# Altium PCB bldc-robot-main-board-2016.PcbDoc
Units mm, origin at the board's own origin, x right, y up, seen from the top; angles counter-clockwise.
Board outline 35 x 45 mm, 2 copper layers (Top Layer, Bottom Layer), stack 1.571 mm thick; 72 components, 74 nets, 415 pads, 119 vias.
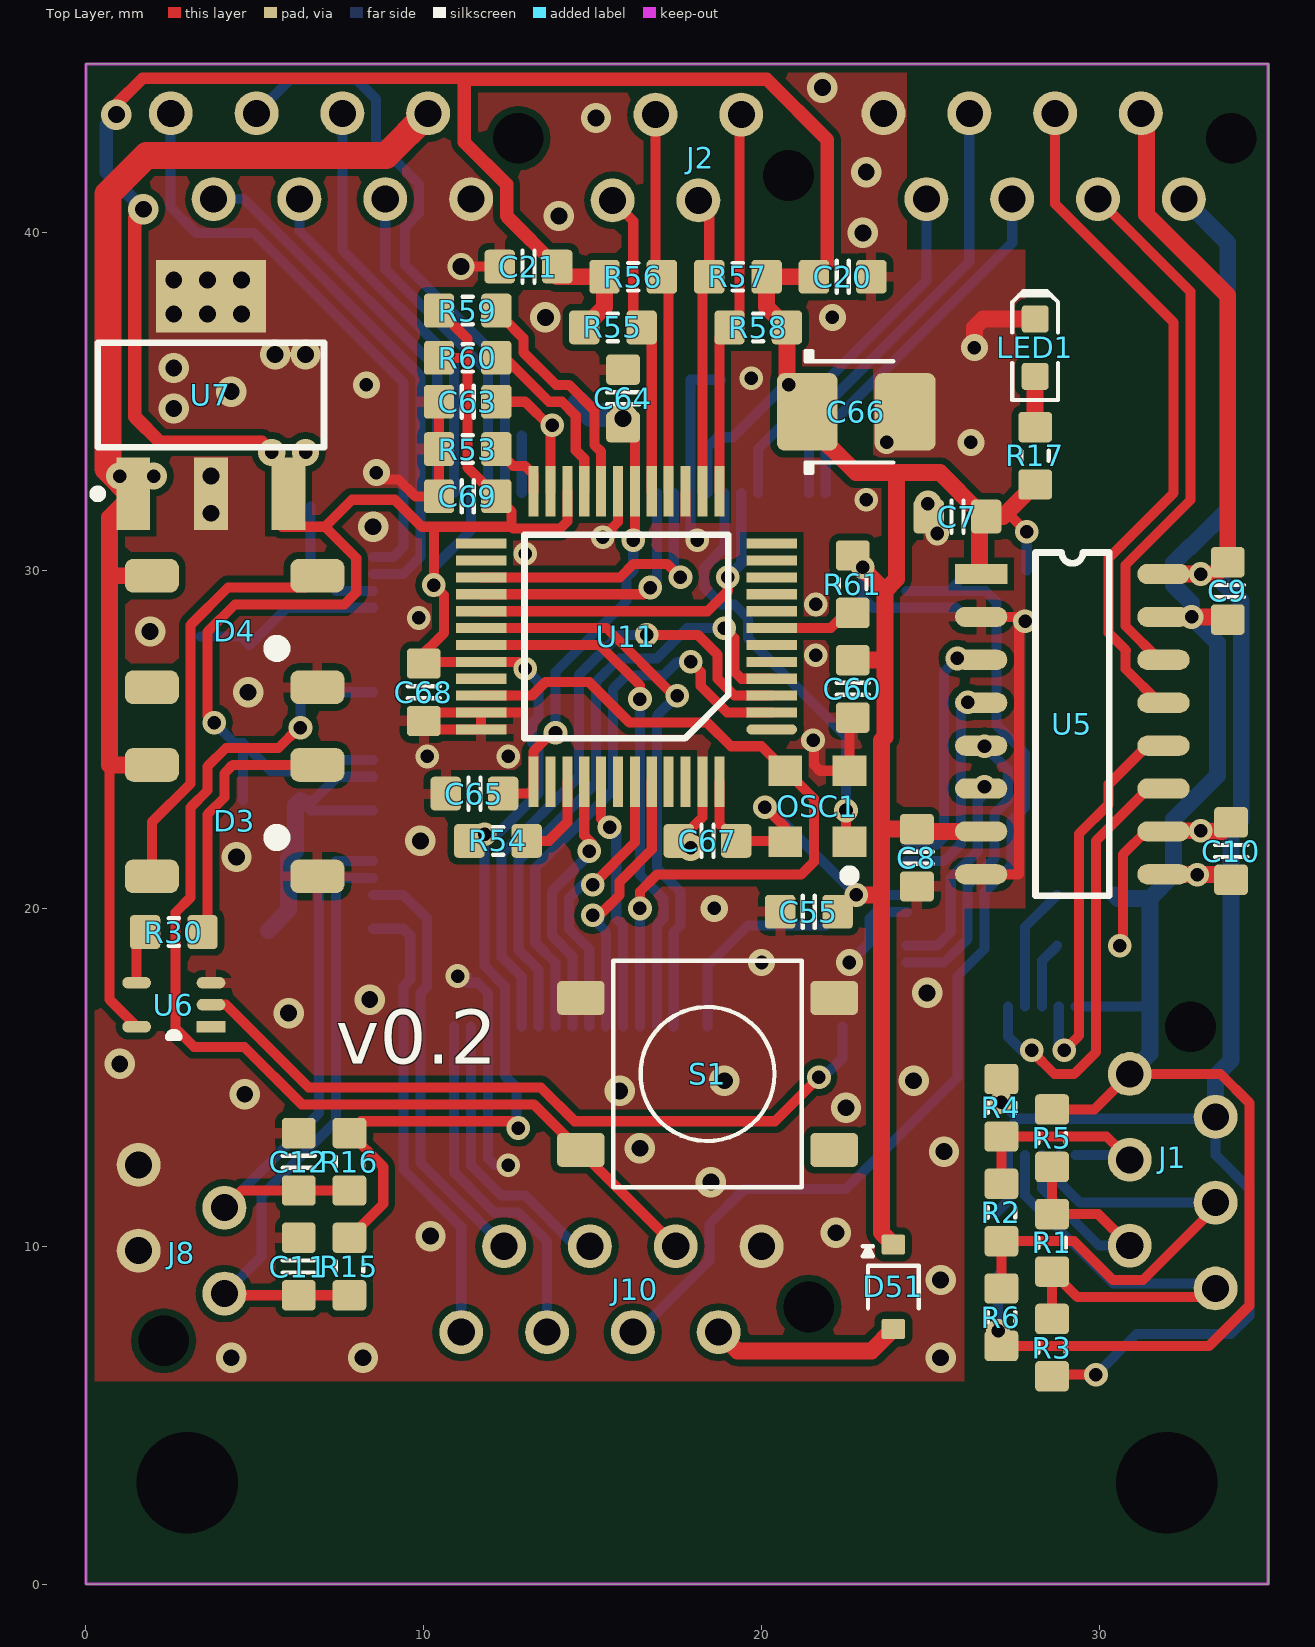
[diagram p0: Top Layer view]
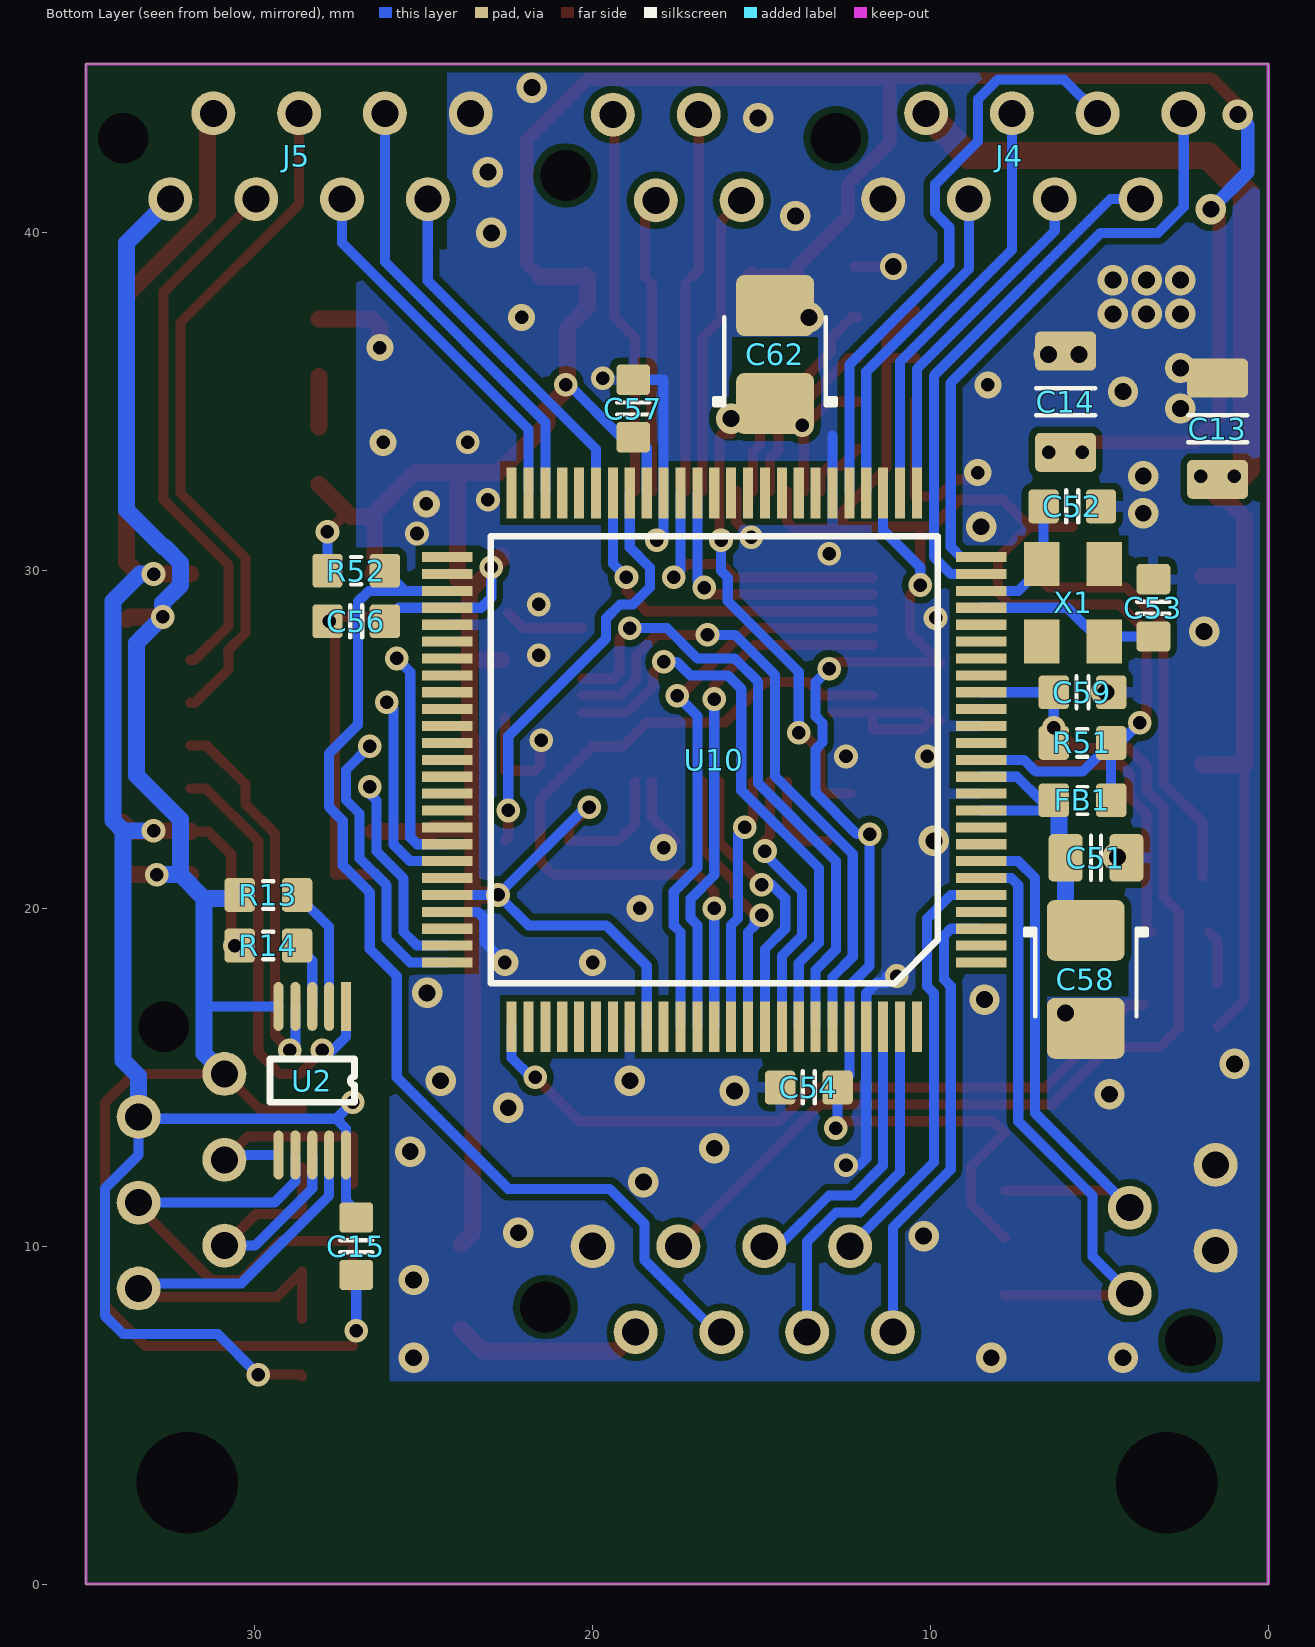
[diagram p1: Bottom Layer view, seen from below]

## Layer stack, top to bottom
Top Solder: solder mask 0.0102, Solder Resist, Dk 3.5
Top Layer: signal copper 0.0356
Dielectric 1: dielectric 1.5, FR-4, Dk 4.8
Bottom Layer: signal copper 0.0356
Bottom Solder: solder mask 0.0102, Solder Resist, Dk 3.5

## Board outline
0,0 35,0 35,45 0,45

## Design rules (kind name [scope] priority, off if disabled: settings)
Clearance [All] p1: gap=0.2
ComponentClearance ComponentClearanceIgnore [InComponent('C101')] p1: gap=0 collisioncheckmode=3 verticalgap=0 showdistances=FALSE
ComponentClearance [All] p2: gap=0.2 collisioncheckmode=3 verticalgap=0.2 showdistances=FALSE
DiffPairsRouting [All] p1: maxlimit=1 minlimit=0.2 mostfreqgap=0.2 toplayer_minwidth=0.2 toplayer_maxwidth=1 toplayer_prefwidth=0.3 bottomlayer_minwidth=0.2 bottomlayer_maxwidth=1 bottomlayer_prefwidth=0.3 maxuncoupledlength=12.7
HoleSize [All] p1: absolutevalues=TRUE maxlimit=5 minlimit=0.025 maxpercent=80.000 minpercent=20.000
MinimumSolderMaskSliver [All] p1: minsoldermaskwidth=0.1
PolygonConnect PolygonConnectDirect [IsVia or InComponent('U7') or InNet('PGND')or InNet('PC_PWR') or InNet('Net16V_1') or InNet('Net19V_IN_1') or InComponent('C66') or InComponent('J4') or InComponent('C62') or InComponent('C13') or InComponent('C14') or InComponent('C58') or InComponent('S1') or InComponent('J8') or InComponent('J5') or InComponent('J10')] p1: connectstyle=Direct reliefconductorwidth=0.254 reliefentries=4 polygonreliefangle="90 Angle" airgapwidth=0.254
PolygonConnect [All] p2: connectstyle=Relief reliefconductorwidth=0.3 reliefentries=4 polygonreliefangle="90 Angle" airgapwidth=0.2
RoomDefinition bldc-robot-main-mbed [InComponentClass('bldc-robot-main-mbed')] p1: confinementstyle=ConfineIn formatcopy=TRUE lockcomponents=FALSE outline 0,0 50,0 50,50 0,50
RoomDefinition bldc-robot-main-board-2016 [InComponentClass('bldc-robot-main-board-2016')] p2: confinementstyle=ConfineIn formatcopy=TRUE lockcomponents=FALSE outline 0,0 50,0 50,50 0,50
RoutingVias [All] p1: holewidth=0.4 width=0.7 viastyle="Through Hole" minholewidth=0.3 minwidth=0.6 maxholewidth=1.5 maxwidth=2
SolderMaskExpansion [All] p1: expansion=0.102
Width [All] p1: maxlimit=2 minlimit=0.2 preferedwidth=0.3 minimp=50.000000 maximp=50.000000 favimp=50.000000
26 further rules are at their usual default settings.

## Classes and differential pairs
component class bldc-robot-main-mbed: C20 C21 C51 C52 C53 C54 C55 C56 C57 C58 C59 C60 C62 C63 C64 C65 C66 C67 C68 C69 D51 FB1 J10 OSC1 R51 R52 R53 R54 R55 R56 R57 R58 R59 R60 R61 S1 U10 U11 X1
component class bldc-robot-main-board-2016: C7 C8 C9 C10 C11 C12 C13 C14 C15 D3 D4 J1 J2 J4 J5 J8 LED1 R1 R2 R3 R4 R5 R6 R13 R14 R15 R16 R17 R30 U2 U5 U6 U7
differential pair RD: +RD_P -RD_N
differential pair TD: +TD_P -TD_N

## Components (designator, comment, footprint, x,y, rotation, side; value= is the part's Value field where it differs from the comment)
C7 "100n" CAPC1608X90N 25.8,31.6 r180 top
C8 "100n" CAPC1608X90N 24.6,21.5 r90 top
C9 "100n" CAPC1608X90N 33.8,29.4 r90 top
C10 "100n" CAPC1608X90N 33.9,21.7 r270 top
C11 "100n" CAPC1608X90N 6.3,9.4 r90 top
C12 "100n" CAPC1608X90N 6.3,12.5 r90 top
C13 "10u" CAPC3216X180N 1.5,34.2 r90 bottom
C14 "10u" CAPC3216X180N 6,35 r90 bottom
C15 "100n" CAPC1608X90N 27,10 r270 bottom
C20 "100nF" CAPC1608X90N 22.4,38.7 r180 top
C21 "100nF" CAPC1608X90N 13.1,39 r180 top
C51 "10u" CAPC2012X135N 5.1,21.5 r180 bottom
C52 "8pF" CAPC1608X90N 5.8,31.9 r180 bottom
C53 "8pF" CAPC1608X90N 3.4,28.9 r90 bottom
C54 "100nF" CAPC1608X90N 13.6,14.7 r0 bottom
C55 "100nF" CAPC1608X90N 21.4,19.9 r180 top
C56 "100nF" CAPC1608X90N 27,28.5 r0 bottom
C57 "100nF" CAPC1608X90N 18.8,34.8 r90 bottom
C58 "10uF Ta" CAPMP3528X210N 5.4,17.9 r270 bottom
C59 "100nF" CAPC1608X90N 5.5,26.4 r180 bottom
C60 "100nF" CAPC1608X90N 22.7,26.5 r90 top
C62 "10uF Ta" CAPMP3528X210N 14.6,36.4 r90 bottom
C63 "100nF" CAPC1608X90N 11.3,35 r0 top
C64 "100nF" CAPC1608X90N 15.9,35.1 r270 top
C65 "100nF" CAPC1608X90N 11.5,23.4 r180 top
C66 "10uF Ta" CAPMP3528X210N 22.8,34.7 r0 top
C67 "100nF" CAPC1608X90N 18.4,22 r0 top
C68 "100nF" CAPC1608X90N 10,26.4 r90 top
C69 "100nF" CAPC1608X90N 11.3,32.2 r0 top
D3 "WS2812B" WS2812B 4.4,22.6 r0 top
D4 "WS2812B" WS2812B 4.4,28.2 r0 top
D51 "" SOD323 23.9,8.8 r270 top
FB1 "60 Ohm" INDC1608N 5.5,23.2 r0 bottom
J1 "RS485" MICRO-MATCH-6 30.9,15.1 r90 top
J2 "ETHERNET" MICRO-MATCH-4 19.4,43.5 r0 top
J4 "HEADER-8" MICRO-MATCH-8 11.4,41 r0 bottom
J5 "HEADER-8" MICRO-MATCH-8 32.5,41 r0 bottom
J8 "BTNS" MICRO-MATCH-4 4.1,8.6 r270 top
J10 "ISP" MICRO-MATCH-8 20,10 r0 top
LED1 "Red" LED-0603-RED 28.1,36.6 r90 top
OSC1 "DSC1033" DSC1033-3.2x2.5 22.6,21.975 r90 top
R1 "120R" RESC1608X55N 28.6,10.1 r90 top
R2 "120R" RESC1608X55N 27.1,11 r270 top
R3 "750R" RESC1608X55N 28.6,7 r90 top
R4 "750R" RESC1608X55N 27.1,14.1 r270 top
R5 "750R" RESC1608X55N 28.6,13.2 r90 top
R6 "750R" RESC1608X55N 27.1,7.9 r270 top
R13 "10k" RESC1608X55N 29.6,20.4 r180 bottom
R14 "10k" RESC1608X55N 29.6,18.9 r0 bottom
R15 "10k" RESC1608X55N 7.8,9.4 r90 top
R16 "10k" RESC1608X55N 7.8,12.5 r90 top
R17 "470R" RESC1608X55N 28.1,33.4 r270 top
R30 "470R" RESC1608X55N 2.6,19.3 r180 top
R51 "10k" RESC1608X55N 5.5,24.9 r0 bottom
R52 "10k" RESC1608X55N 27,30 r0 bottom
R53 "4k87" RESC1608X55N 11.3,33.6 r180 top
R54 "2k2" RESC1608X55N 12.2,22 r0 top
R55 "49R9" RESC1608X55N 15.6,37.2 r180 top
R56 "49R9" RESC1608X55N 16.2,38.7 r0 top
R57 "49R9" RESC1608X55N 19.3,38.7 r0 top
R58 "49R9" RESC1608X55N 19.9,37.2 r180 top
R59 "2k2" RESC1608X55N 11.3,37.7 r180 top
R60 "2k2" RESC1608X55N 11.3,36.3 r180 top
R61 "10k" RESC1608X55N 22.7,29.6 r90 top
S1 "TS-1143S-WP" TS-1143S 18.4,15.1 r0 top
U2 "SN65HVD73" SOP10 27.3,17.1 r270 bottom
U5 "SI8641" SOIC16 26.5,29.9 r0 top
U6 "MC74VHC1GT50" SC70-5 3.7,16.5 r180 top
U7 "MCP1825S" SOT230P700X180-4N 3.7,35.2 r90 top
U10 "LPC1768" LQFP100 8.5,18.4 r0 bottom
U11 "DP83848C" PQFP48 20.3,25.3 r180 top
X1 "12MHz" XTAL-3.2x2.5 6.7,30.2 r270 bottom

## Footprints (in the part's own frame and the unit in brackets; to place one, negate y for a bottom-side part, rotate by r counter-clockwise, add the part's x,y. Pads: shape width x height; smd on the part's side, far side on the other; paste and mask are expansions set on the pad)
CAPC1608X90N [mm] "Chip Capacitor, Body 1.6x0.8mm, EIA 0603, IPC Medium Density"
  round 0.254 on Mech15: 0(0,0)
  rrect25% 0.9x1 smd: 1(-0.85,0) 2(0.85,0)
  Top Layer pour cut-out: -0.6,0.5 -0.4,0.7 0.4,0.7 0.6,0.5 0.6,-0.5 0.4,-0.7 -0.4,-0.7 -0.6,-0.5
  silkscreen extent -0.18,-0.48 0.18,0.48, body extent -0.85,-0.45 0.85,0.45, height 0.89
CAPC2012X135N [mm] "Chip Capacitor, Body 2.0x1.2mm, EIA 0805, IPC Medium Density"
  round 0.254 on Mech15: 0(0,0)
  rrect25% 1x1.4 smd: 1(-0.9,0) 2(0.9,0)
  Top Layer pour cut-out: -0.675,0.7 -0.475,0.9 0.475,0.9 0.675,0.7 0.675,-0.7 0.475,-0.9 -0.475,-0.9 -0.675,-0.7
  silkscreen extent -0.15,-0.65 0.15,0.65, body extent -1.1,-0.72 1.1,0.73, height 1.34
CAPC3216X180N [mm] "Chip Capacitor, Body 3.2x1.6mm, 1.8mm H, EIA 1206, IPC Medium Density"
  round 0.508 on Mech15: 0(0,0)
  rrect25% 1.15x1.8 smd: 1(-1.5,0) 2(1.5,0)
  silkscreen extent -0.4,-0.88 0.4,0.88, body extent -1.7,-0.9 1.7,0.9, height 1.8
CAPMP3528X210N [mm] "Molded body capacitor, Body 3.5x2.8mm, 1210, IPC Nominal settings"
  round 0.254 on Mech15: 0(0,0)
  rrect25% 1.8x2.3 smd: 1(-1.45,0) 2(1.45,0)
  Top Layer pour cut-out: -0.508,1.27 0.508,1.27 0.508,-1.27 -0.508,-1.27
  silkscreen extent -1.5,-1.8 1.1,1.8, body extent -1.75,-1.4 1.75,1.4, height 2.1
DSC1033-3.2x2.5 [mm]
  rect 0.9x1 smd: 1(0,0) 2(2.1,0) 3(2.1,1.9) 4(0,1.9)
  silkscreen extent -1.1,-0.1 -0.9,0.1, body extent -0.55,-0.3 2.65,2.2, height 0.8
INDC1608N [mm] "Chip bead, Body 1.6x0.8mm, 0603, IPC Medium Density"
  round 0.254 on Mech15: 0(0,0)
  rrect25% 0.9x1 smd: 1(-0.85,0) 2(0.85,0)
  Top Layer pour cut-out: -0.4,0.6 0.4,0.6 0.4,-0.6 -0.4,-0.6
  silkscreen extent -0.15,-0.41 0.15,0.41, body extent -0.8,-0.4 0.8,0.4, height 0.79
LED-0603-RED [mm]
  round 0.254 on Mech15: 0(0,0)
  rrect25% 0.8x0.8 smd: A(-0.85,0) K(0.85,0)
  Top Layer pour cut-out: -0.5,0.5 0.5,0.5 0.5,-0.5 -0.5,-0.5
  silkscreen extent -1.55,-0.67 1.68,0.67, body extent -0.8,-0.4 0.8,0.4, height 0.75
LQFP100 [mm]
  rect 1.5x0.3 smd: 1(0,0) 2(0,-0.5) 3(0,-1) 4(0,-1.5) 5(0,-2) 6(0,-2.5) 7(0,-3) 8(0,-3.5) 9(0,-4) 10(0,-4.5) 11(0,-5) 12(0,-5.5) 13(0,-6) 14(0,-6.5) 15(0,-7) 16(0,-7.5) 17(0,-8) 18(0,-8.5) 19(0,-9) 20(0,-9.5) 21(0,-10) 22(0,-10.5) 23(0,-11) 24(0,-11.5) 25(0,-12) 51(15.8,-12) 52(15.8,-11.5) 53(15.8,-11) 54(15.8,-10.5) 55(15.8,-10) 56(15.8,-9.5) 57(15.8,-9) 58(15.8,-8.5) 59(15.8,-8) 60(15.8,-7.5) 61(15.8,-7) 62(15.8,-6.5) 63(15.8,-6) 64(15.8,-5.5) 65(15.8,-5) 66(15.8,-4.5) 67(15.8,-4) 68(15.8,-3.5) 69(15.8,-3) 70(15.8,-2.5) 71(15.8,-2) 72(15.8,-1.5) 73(15.8,-1) 74(15.8,-0.5) 75(15.8,0)
  rect 0.3x1.5 smd: 26(1.9,-13.9) 27(2.4,-13.9) 28(2.9,-13.9) 29(3.4,-13.9) 30(3.9,-13.9) 31(4.4,-13.9) 32(4.9,-13.9) 33(5.4,-13.9) 34(5.9,-13.9) 35(6.4,-13.9) 36(6.9,-13.9) 37(7.4,-13.9) 38(7.9,-13.9) 39(8.4,-13.9) 40(8.9,-13.9) 41(9.4,-13.9) 42(9.9,-13.9) 43(10.4,-13.9) 44(10.9,-13.9) 45(11.4,-13.9) 46(11.9,-13.9) 47(12.4,-13.9) 48(12.9,-13.9) 49(13.4,-13.9) 50(13.9,-13.9) 76(13.9,1.9) 77(13.4,1.9) 78(12.9,1.9) 79(12.4,1.9) 80(11.9,1.9) 81(11.4,1.9) 82(10.9,1.9) 83(10.4,1.9) 84(9.9,1.9) 85(9.4,1.9) 86(8.9,1.9) 87(8.4,1.9) 88(7.9,1.9) 89(7.4,1.9) 90(6.9,1.9) 91(6.4,1.9) 92(5.9,1.9) 93(5.4,1.9) 94(4.9,1.9) 95(4.4,1.9) 96(3.9,1.9) 97(3.4,1.9) 98(2.9,1.9) 99(2.4,1.9) 100(1.9,1.9)
  silkscreen extent 1.28,-12.61 14.51,0.62, body extent -0.1,-14 15.9,2, height 1.6
MICRO-MATCH-4 [mm]
  round 1.3 hole 0.8: 1(0,0) 2(-1.27,-2.54) 3(-2.54,0) 4(-3.81,-2.54)
  round 0 hole 1.5 unplated: drill(1.4,-1.8)
  body extent -5.41,-3.77 1.6,1.23, height 4
MICRO-MATCH-6 [mm]
  round 1.3 hole 0.8: 1(0,0) 2(-1.27,-2.54) 3(-2.54,0) 4(-3.81,-2.54) 5(-5.08,0) 6(-6.35,-2.54)
  round 0 hole 1.5 unplated: drill(1.4,-1.8)
  body extent -7.95,-3.77 1.6,1.23, height 4
MICRO-MATCH-8 [mm]
  round 1.3 hole 0.8: 1(0,0) 2(-1.27,-2.54) 3(-2.54,0) 4(-3.81,-2.54) 5(-5.08,0) 6(-6.35,-2.54) 7(-7.62,0) 8(-8.89,-2.54)
  round 0 hole 1.5 unplated: drill(1.4,-1.8)
  body extent -10.49,-3.77 1.6,1.23, height 4
PQFP48 [mm]
  oval 1.5x0.3 smd: 1(0,0)
  rect 1.5x0.3 smd: 2(0,-0.5) 3(0,-1) 4(0,-1.5) 5(0,-2) 6(0,-2.5) 7(0,-3) 8(0,-3.5) 9(0,-4) 10(0,-4.5) 11(0,-5) 12(0,-5.5) 25(8.6,-5.5) 26(8.6,-5) 27(8.6,-4.5) 28(8.6,-4) 29(8.6,-3.5) 30(8.6,-3) 31(8.6,-2.5) 32(8.6,-2) 33(8.6,-1.5) 34(8.6,-1) 35(8.6,-0.5) 36(8.6,0)
  rect 0.3x1.5 smd: 13(1.55,-7.05) 14(2.05,-7.05) 15(2.55,-7.05) 16(3.05,-7.05) 17(3.55,-7.05) 18(4.05,-7.05) 19(4.55,-7.05) 20(5.05,-7.05) 21(5.55,-7.05) 22(6.05,-7.05) 23(6.55,-7.05) 24(7.05,-7.05) 37(7.05,1.55) 38(6.55,1.55) 39(6.05,1.55) 40(5.55,1.55) 41(5.05,1.55) 42(4.55,1.55) 43(4.05,1.55) 44(3.55,1.55) 45(3.05,1.55) 46(2.55,1.55) 47(2.05,1.55) 48(1.55,1.55)
  silkscreen extent 1.28,-5.76 7.31,0.27, body extent -0.27,-7.33 8.87,1.82, height 1.62
RESC1608X55N [mm] "Chip Resistor, Body 1.6x0.8mm, EIA 0603, IPC Medium Density"
  round 0.254 on Mech15: 0(0,0)
  rrect25% 0.9x1 smd: 1(-0.85,0) 2(0.85,0)
  Top Layer pour cut-out: -0.6,0.5 -0.4,0.7 0.4,0.7 0.6,0.5 0.6,-0.5 0.4,-0.7 -0.4,-0.7 -0.6,-0.5
  silkscreen extent -0.15,-0.41 0.15,0.41, body extent -0.87,-0.47 0.88,0.48, height 0.54
SC70-5 [mm]
  rect 0.85x0.35 smd: 1(0,0)
  oval 0.85x0.35 smd: 2(0,-0.65) 3(0,-1.3) 4(2.2,-1.3) 5(2.2,0)
  silkscreen extent 0.94,0.16 1.26,0.33, body extent -0.08,-1.7 2.23,0.4, height 1
SOD323 [mm] "SOD-323; 2 Leads; Body 1.8 x 1.35 mm, (LxW)"
  round 0.508 on Mech15: 0(0,0)
  rrect25% 0.6x0.7 smd: A(1.25,0) K(-1.25,0)
  silkscreen extent -1.2,-0.9 0.64,0.75, body extent -1.3,-0.68 1.3,0.68, height 1.1
SOIC16 [mm]
  rect 1.55x0.6 smd: 1(0,0)
  oval 1.55x0.6 smd: 2(0,-1.27) 3(0,-2.54) 4(0,-3.81) 5(0,-5.08) 6(0,-6.35) 7(0,-7.62) 8(0,-8.89) 9(5.4,-8.89) 10(5.4,-7.62) 11(5.4,-6.35) 12(5.4,-5.08) 13(5.4,-3.81) 14(5.4,-2.54) 15(5.4,-1.27) 16(5.4,0)
  silkscreen extent 1.61,-9.53 3.79,0.64, body extent -0.25,-9.42 5.66,0.57, height 1.46
SOP10 [mm]
  rect 1.45x0.3 smd: 1(0,0)
  oval 1.45x0.3 smd: 2(0,-0.5) 3(0,-1) 4(0,-1.5) 5(0,-2) 6(4.4,-2) 7(4.4,-1.5) 8(4.4,-1) 9(4.4,-0.5) 10(4.4,0)
  silkscreen extent 1.56,-2.25 2.84,0.25, body extent -0.27,-2.5 4.63,0.5, height 1.15
SOT230P700X180-4N [mm] "SOT223, 4-Leads, Body 6,50x7,00mm (avg), Pitch 2,30mm, IPC Medium Density"
  rect 2.15x1 smd: 1(-2.925,2.3) 2(-2.925,0) 3(-2.925,-2.3)
  rect 2.15x3.25 smd: 4(2.925,0)
  silkscreen extent -3.05,-3.35 1.55,3.47, body extent -1.85,-3.35 1.85,3.35, height 1.8
TS-1143S [mm] "6.5x6.5mm SMD tact switch 4.3mm stem"
  round 0.508 on Mech15: 0(0,0)
  rrect25% 1.4x1 smd: 1(-3.75,2.25) 1(3.75,2.25) 2(-3.75,-2.25) 2(3.75,-2.25)
  silkscreen extent -2.79,-3.35 2.79,3.35, body extent -4,-3.25 4,3.25, height 4.3
WS2812B [mm]
  rrect50% 1.6x1 smd: 1(-2.45,1.65) 2(-2.45,-1.65) 3(2.45,-1.65) 4(2.45,1.65)
  silkscreen extent 1.05,-0.7 1.45,-0.3, body extent -2.7,-2.5 2.7,2.5, height 1.71
XTAL-3.2x2.5 [mm]
  rect 1.3x1.05 smd: 1(0,0) 2(2.3,0) 3(2.3,1.85) 4(0,1.85)
  body extent -0.45,-0.32 2.75,2.18, height 0.8

## Part data
C7 C8 C9 C10 C11 C12 C15: library part CAPC_100n_0603_X7R_50V_10%, "Capacitor SMD Cer 100nF 10% 50V X7R 0603"
C13 C14: library part CAPC_10u_1206_10V, "Capacitor SMD Cer 10uF 10% 10V X5R 1206"
C20 C21 C52 C53 C54 C55 C56 C57 C59 C60 C63 C64 C65 C67 C68 C69: library part CAPC_18p_0603_100V, "Capacitor SMD Cer 18pF 2% 100V NP0 0603"
C51: library part CAPC_10u_0805_10V, "Capacitor SMD Cer 10uF 10% 10V X5R 0805"
C58 C62 C66: library part CAPT_47u_1210_6V3, "Capacitor SMD Tantalum 47uF 20% 6.3V 1210"
D51: library part DIODE_SCHOTTKY_SS0520, "Diode Schottky SMD 20V 0.5A SOD123"
FB1: library part FERRITE_120R-100MHz_0603, "Ferrite bead 120 Ohm at 100 MHz 2A 0603 SMD"
J1: library part HEADER-6
J2 J8: library part HEADER-4
J10: library part HEADER-8
LED1: library part LED_SMD_Red_0603_220mcd, "LED 0603 SMD Hyper Red 630nm 220mcd 20mA"
R1 R2 R3 R4 R5 R6 R13 R14 R15 R16 R17 R30: library part RES_120R_0603_5%, "Resistor SMD chip 120 Ohm 0.1W 5% 0603"
R51 R52 R53 R54 R55 R56 R57 R58 R59 R60 R61: library part RES_10K_0603_5%, "Resistor SMD chip 10k Ohm 0.1W 5% 0603"
S1: library part SW_SMD_PB_4.3mm, "Switch SMD Tact 4.3mm Stem"
U2: library part SN65HVD3086E
U7: library part MIC5239
X1: library part XTAL-3.2X2.5

## Free pads (board coordinates)
  round 0 hole 3 unplated: 0(3,3) 1(32,3)

## Via types
v1: diameter 0.7, hole 0.4, Top Layer to Bottom Layer, 59 vias
v2: diameter 0.9, hole 0.5, Top Layer to Bottom Layer, 45 vias
v3: diameter 0.8, hole 0.4, Top Layer to Bottom Layer, 14 vias
v4: diameter 0.8, hole 0.5, Top Layer to Bottom Layer, 1 vias

## Nets (pads, with @x,y where several pads share a name; then routed paths per layer and width w, separated by ;. In a path a pad name is that pad's centre, name@x,y a point inside that pad or via, vN(x,y) a via of type N, cw(c..) or ccw(c..) an arc to the next point about the centre after c; other vN are vias at no path point)
3.3V: C7.1 C8.2 C14.1 C20.2 C21.1 C54.1 C55.1 C56.1 C57.1 C60.2 C66.1 C67.2 C68.2 C69.2 D51.K FB1.1 OSC1.4 R15.2 R16.2 R17.2 R51.1 R52.2 R54.1 R55.2 R56.1 R57.2 R58.1 R59.2 R60.2 R61.2 U5.1 U5.7 U7.3 U10.13 U10.28 U10.42 U10.54 U10.71 U10.84 U10.96 U11.22 U11.32 U11.48 | length 195.6
  Top Layer w0.3: v1(3.8,25.5) 3.6,25.7 3.6,28.188 4.412,29 7.649,29 8,29.351 8,30.374 7.074,31.3 ; U7.3@5.8,31.3 7.074,31.3 ; R15.2 8.8,11.25 8.8,12.35 R16.2 8.15,13.7 12.6,13.7 v1(12.8,13.5) ; C68.2@9.7,27.25 C68.2@9.75,27.3 ; R60.2 11.3,36.3 ; R59.2 11.3,36.85 11.3,36.3 ; v1@13.2,27.1 v1(13,27.1) 12.8,27.3 U11.32 C68.2@9.75,27.3 ; U11.22 14.25,31.455 14.042,31.247 12.647,31.247 12.595,31.3 ; U11.48 18.75,22.5 C67.2 20.7,22 20.7,22.4 v1(20.1,23) ; C66.1@20.7,35.5 v1(20.8,35.5) ; C7.1@26.45,31.6 C7.1 ; 27.15,31.6 27.4,31.6 v1(27.85,31.15) ; 7.074,31.3 7.874,32.1 9.143,32.1 9.943,31.3 10.3,31.3 ; C68.2@9.75,27.3 10.6,28.15 10.6,29.275 v1(10.3,29.575) 10.3,31.3 ; 10.3,31.3 12.595,31.3 ; 11.3,36.3 11.3,33.05 C69.2 12.595,31.755 12.595,31.3
  Top Layer w0.35: v2(0.9,43.5) 0.9,43.8 1.675,44.575 11.175,44.575 11.2,44.55
  Top Layer w0.4: v2(1.7,40.7) 1.45,40.45 1.45,34.55 2.2,33.8 5.2,33.8 v3(5.5,33.5) ; C21.1 12.45,40.5 12.45,41.435 11.2,42.685 11.2,44.55 20.15,44.55 21.95,42.75 21.95,39.1 C20.2
  Top Layer w0.5: C21.1@13.95,38.7 R56.1 ; R55.2 15.35,37.8 R56.1 ; R56.1@15.3,38.75 R56.1 ; R57.2@20.2,38.75 R57.2 ; C66.1 21.35,34.35 22.8,32.9 25.277,32.9 26.45,31.727 26.45,31.6 26.45,29.95 U5.1 ; C66.1@21.45,34.7 20.75,35.4 R58.1 20.15,37.8 R57.2 ; C20.2 R57.2 ; C60.2 23.6,27.35 23.65,27.4 ; R61.2 22.7,30.35 23.65,29.4 ; v1(22.8,20.4) 23.55,20.4 ; D51.K 23.55,10.4 23.55,20.4 ; 24,32.9 24,29.75 23.65,29.4 ; U5.7 24.77,22.28 24.7,22.35 C8.2 23.575,22.35 23.55,22.325 ; C7.1 27.15,31.6 R17.2 ; 23.55,20.4 23.55,22.325 ; 23.55,22.325 23.55,24.98 23.65,25.08 23.65,27.4 ; 23.65,27.4 23.65,29.4
  Bottom Layer w0.3: v1(3.8,25.5) 4.4,24.9 R51.1 ; FB1.1 R51.1 ; U10.13 7.229,24.4 6.879,24.05 5.5,24.05 R51.1 ; v1(10.3,29.575) 10.3,30.098 11.4,31.198 U10.28 ; v1(12.8,13.5) 12.75,13.55 C54.1 12.4,15.05 U10.96 12.4,17.7 11.8,18.3 v1(11.8,22.2) 12.179,22.2 13.4,23.421 13.4,24.71 13.2,24.91 13.2,25.49 13.4,25.69 13.4,26.7 v1(13,27.1) ; U10.84 18.4,18.3 19.6,19.5 21.9,19.5 v1(22.8,20.4) ; U10.42 18.4,33.65 18.7,33.95 19.15,33.95 20.7,35.5 v1(20.8,35.5) ; v1(20.1,23) 20.2,23 v1(22.8,20.4) ; v1(23,30.1) 23,29.2 23.3,28.9 U10.54 25.75,28.9 C56.1 ; U10.71 v1(22.8,20.4) ; R52.2 v1(27.85,31.15)
  Bottom Layer w0.4: v2(0.9,43.5) 0.6,43.2 0.6,41.8 v2(1.7,40.7) v2@1.6,40.7
  other v3: 6.5,33.5
3.3V_RS485: C9.2 C10.1 C15.1 J1.2 J5.2 R3.1 R4.1 R14.2 U2.10 U5.10 U5.16 | length 63.3
  Top Layer w0.3: R3.1 28.65,6.2 v1(29.9,6.2) ; v1(30.6,18.9) 30.7,19 30.7,21.6 31.38,22.28 U5.10
  Top Layer w0.5: J5.2 31.4,43.37 31.4,40.544 33.8,38.144 C9.2 33.45,29.9 v1(33,29.9) U5.16 ; U5.10 31.92,22.3 v1(33,22.3) ; v1@33,22.28 33.63,22.28 C10.1
  Bottom Layer w0.3: C15.1@26.9,10.95 27.3,11.35 U2.10 27.3,13.482 27.593,13.775 ; v1(27.1,14.268) 27.593,13.775 ; v1(29.9,6.2) 31.1,7.4 33.9,7.4 34.44,7.94 34.44,11.704 33.44,12.704 J1.2 33.385,13.775 27.593,13.775
  Bottom Layer w0.5: v1(33,22.3) 33.9,22.3 ; v1(33,29.9) 33.4,29.9 34.2,29.1 34.2,22.6 33.9,22.3 ; J1.2 33.44,15.04 33.9,15.5 33.9,22.3
5V: C13.1 D3.1 D4.1 J4.2 U6.5 U7.1 | length 38.6
  Top Layer w0.3: 0.7,24.25 0.7,17.3 U6.5
  Top Layer w0.5: U7.1 0.7,31.575 0.7,29.85 ; D3.1 0.7,24.25 0.7,29.85 ; D4.1 0.7,29.85
  Top Layer w0.8: U7.1 0.65,33.025 0.65,41.15 1.79,42.29 8.88,42.29 J4.2
  other v3: 1,32.8 2,32.8
50MHZ: OSC1.3 U10.88 U11.34 | length 22.8
  Top Layer w0.3: U11.34 13.2,26.3 13.6,26.7 14.9,26.7 16.1,25.5 16.69,25.5 18.395,25.5 19.095,24.8 20,24.8 21.55,23.25 21.55,21.38 21.17,21 16.9,21 16.4,20.5 v1(16.4,20)
  Bottom Layer w0.3: U10.88 v1(16.4,20)
A: J1.6 R1.1 R3.2 U2.9 | length 14.6
  Top Layer w0.3: R3.2 R1.1 29.35,8.5 33.19,8.5 J1.6
  Bottom Layer w0.3: U2.9 27.8,11.504 30.404,8.9 33.29,8.9 J1.6
B: J1.5 R1.2 R5.1 U2.8 | length 8.4
  Top Layer w0.3: R5.1 R1.2 29.97,10.95 J1.5
  Bottom Layer w0.3: U2.8 28.3,11.711 29.991,10.02 J1.5
BALL_SENS: J5.7 U10.45 | length 10.8
  Bottom Layer w0.3: U10.45 19.9,33.6 24.88,38.58 J5.7
BTN1: C11.1 J8.1 R15.1 U10.6 | length 18.4
  Top Layer w0.3: J8.1 4.15,8.55 C11.1 R15.1
  Bottom Layer w0.3: J8.1 5.2,9.7 5.2,11.5 7.4,13.7 7.4,20.695 7.605,20.9 U10.6
BTN2: C12.1 J8.3 R16.1 U10.7 | length 16.6
  Top Layer w0.3: J8.3 4.61,11.65 C12.1 R16.1
  Bottom Layer w0.3: J8.3 6.9,13.94 6.9,20.902 7.398,21.4 U10.7
CHARGE: J4.5 U10.26 | length 10.4
  Bottom Layer w0.3: J4.5 6.32,40.055 10.4,35.975 U10.26
DONE: J4.6 U10.30 | length 17.8
  Bottom Layer w0.3: J4.6 6.05,44.54 8.004,44.54 8.59,43.954 8.59,42.71 9.86,41.44 9.86,40.586 9.444,40.17 9.444,39.052 12.4,36.096 U10.30
ETH_OSC_EN: OSC1.1 U10.43 | length 12.7
  Top Layer w0.3: v1(22.5,22.9) 22.5,22.1 OSC1.1@22.6,22
  Bottom Layer w0.3: U10.43 18.9,30.69 18.3,30.09 18.3,29.51 18.81,29 19.19,29 19.6,28.59 19.6,28 22.5,25.1 v1(22.5,22.9) v1@22.4,22.9
ETH_RST: U10.44 U11.29 | length 10.6
  Top Layer w0.3: U11.29 13.496,28.8 14.904,28.8 18.4,28.8 19,29.4 v1(19,29.8)
  Bottom Layer w0.3: v1(19,29.8) 19.4,30.2 U10.44
GND: C7.2 C8.1 C11.2 C12.2 C13.2 C14.2 C20.1 C21.2 C51.2 C52.2 C53.2 C54.2 C55.2 C56.2 C57.2 C58.2 C59.2 C60.1 C62.2 C63.1 C64.1 C65.2 C66.2 C67.1 C68.1 C69.1 D3.3 D4.3 J4.1 J5.8 J8.2 J8.4 J10.1 LED1.K OSC1.2 R53.2 S1.1 U5.2 U5.8 U6.3 U7.2 U7.4 U10.11 U10.15 U10.31 U10.41 U10.55 U10.72 U10.83 U10.97 U11.15 U11.19 U11.35 U11.36 U11.47 | length 47.6
  Top Layer w0.3: v3(8.6,32.9) 8.6,32.8 8.7,32.7 9.25,32.7 9.75,32.2 C69.1 R53.2 C63.1 ; C68.1 10.25,25.8 U11.35 ; C68.1@10.15,25.4 10.25,25.3 U11.36 U11.35 ; v4@11.4,39 C21.2 ; 12.9,25.8 U11.35 ; v1(15.3,30.99) 15.75,31.44 U11.19 ; C67.1 18.25,22.7 U11.47 ; v1(21.525,24.975) 21.55,24.95 21.55,24.25 21.725,24.075 OSC1.2 ; OSC1.2@22.6,24.1 C60.1@22.6,25.65 ; U5.8 27.61,21.01 27.625,21.025 27.625,28.325 v1(27.8,28.5) 27.8,28.63 U5.2
  Top Layer w0.5: v3(26.3,36.6) 26.3,37.2 26.55,37.45 LED1.K
  Bottom Layer w0.3: v1(11,18) 11.3,18 11.3,17.8 11.593,17.8 11.9,17.493 U10.97 11.9,12.601 12.101,12.4 v1(12.5,12.4) ; U10.31 12.9,34 ; v1(18.1,30.9) 17.9,31.1 U10.41 17.9,35.65 C57.2 ; v3(22.6,18.4) 23.2,19 23.2,19.695 23.405,19.9 U10.72 ; v1(27.8,28.5) C56.2
  other v1: 10.1,24.5 12.5,24.5 21.6,27.5 9.85,28.6 21.6,29 13,30.5 25.2,31.1 23.1,32.1 23.7,33.8 19.7,35.7
  other v2: 4.3,6.7 8.2,6.7 25.3,6.7 25.3,9 10.2,10.3 22.2,10.4 18.5,11.9 25.4,12.8 16.4,12.9 22.5,14.1 4.7,14.5 15.8,14.6 18.9,14.9 24.5,14.9 1,15.4 6,16.9 8.4,17.3 24.9,17.5 4.457,21.524 9.9,22 4.8,26.4 1.9,28.2 8.5,31.3 3.7,31.7 3.7,32.8 2.6,34.8 4.3,35.3 2.6,36 5.6,36.4 6.5,36.4 13.6,37.5 2.6,37.6 3.6,37.6 4.6,37.6 2.6,38.6 3.6,38.6 4.6,38.6 23,40 14,40.5 23.1,41.8 15.1,43.4 21.8,44.3
  other v3: 20,18.4 18.6,20 17.9,21.8 24.925,31.975 26.2,33.8 8.3,35.5 22.1,37.5
  other v4: 11.1,39
GND_RS485: C9.1 C10.2 C15.2 J1.1 J5.1 R5.2 R6.2 R13.1 U2.5 U5.9 U5.15 | length 58.2
  Top Layer w0.3: R6.2 33.25,7.05 34.44,8.24 34.44,14.244 33.584,15.1 J1.1 29.85,14.05 R5.2
  Top Layer w0.5: U5.9 31.91,21 v1(32.9,21) ; v1(32.73,28.63) 33.72,28.63 C9.1 ; v1@32.9,21.01 33.74,21.01 C10.2
  Bottom Layer w0.3: v1(27,7.5) C15.2 ; U2.5 31.5,17.1 ; R13.1 R13.1@30.65,20.4
  Bottom Layer w0.5: R13.1 30.55,20.3 31.5,20.3 ; J1.1 31.5,15.7 31.5,17.1 31.5,20.3 ; J5.1 33.8,39.7 33.8,31.8 32.7,30.7 32.669,30.7 32.2,30.231 32.2,29.569 32.73,29.039 v1(32.73,28.63) 33.5,27.86 33.5,23.931 32.2,22.631 32.2,21 ; v1(32.9,21) 32.2,21 ; 31.5,20.3 32.2,21
ISP: J10.4 R52.1 U10.53 | length 32.3
  Bottom Layer w0.3: J10.4 16.334,7.46 18.46,9.586 18.46,10.66 19.5,11.7 22.5,11.7 25.8,15 25.8,18 26.6,18.8 26.6,20.477 27.4,21.277 27.4,22.6 27.8,23 27.8,24.59 26.95,25.44 26.95,29.079 26.629,29.4 25.55,29.4 ; U10.53 25.55,29.4 ; R52.1 25.55,29.4
KICK1: J4.3 U10.29 | length 10
  Bottom Layer w0.3: J4.3 8.86,38.929 11.9,35.889 U10.29
KICK2: J4.4 U10.27 | length 12.6
  Bottom Layer w0.3: J4.4 7.59,39.492 10.9,36.182 U10.27
LED_ACT: U11.26
LED_LINK: U10.39 U11.28 | length 8
  Top Layer w0.3: U11.28 13.703,29.3 14.697,29.3 ; 14.697,29.3 16.5,29.3 v1(16.7,29.5)
  Bottom Layer w0.3: v1(16.7,29.5) 16.9,29.7 U10.39
LED_SPEED: U10.40 U11.27 | length 8.8
  Top Layer w0.3: U11.27 13.91,29.8 14.49,29.8 15.81,29.8 16.21,30.2 17.2,30.2 v1(17.6,29.8)
  Bottom Layer w0.3: U10.40 17.4,30 v1(17.6,29.8)
MISO: U10.77
MOSI: U6.2 U10.76 | length 21.8
  Top Layer w0.3: U6.2 4.145,17.15 6.595,14.7 13.467,14.7 14.467,13.7 20.4,13.7 v1(21.7,15)
  Bottom Layer w0.3: v1(21.7,15) 21.82,15 22.4,15.58 U10.76
NetC51_1: C51.1 C58.1 FB1.2 U10.10 U10.12 | length 8.7
  Bottom Layer w0.3: FB1.2 6.736,23.2 7.436,23.9 U10.12 ; FB1.2@6.5,23.05 6.65,22.9 U10.10
  Bottom Layer w0.5: C58.1 6,19.95 C51.1 6.2,21.7 6.2,23.05 FB1.2
NetC52_1: C52.1 U10.23 X1.1 | length 3.9
  Bottom Layer w0.3: C52.1 6.65,30.15 7.4,29.4 U10.23
NetC53_1: C53.1 U10.22 X1.3 | length 5.7
  Bottom Layer w0.3: C53.1 4.6,28.05 4.85,27.8 5.95,28.9 U10.22
NetD3_2: D3.2 D4.4 | length 12.3
  Top Layer w0.3: D3.2 1.95,22.55 3.1,23.7 3.1,28.395 4.205,29.5 6.5,29.5 D4.4
NetD3_4: D3.4 R30.1 | length 7.8
  Top Layer w0.3: R30.1 3.6,19.45 3.6,22.786 4.1,23.286 4.1,24 4.35,24.25 D3.4
NetD51_A: D51.A J10.2 | length 5.7
  Top Layer w0.5: J10.2 19.29,6.9 23.25,6.9 D51.A
NetLED1_A: LED1.A R17.1 | length 1.5
  Top Layer w0.5: R17.1 LED1.A
NetR13_2: R13.2 U2.2 | length 3.7
  Bottom Layer w0.3: U2.2 27.8,19.45 R13.2
NetR14_1: R14.1 U2.3 | length 2
  Bottom Layer w0.3: U2.3 28.3,18.45 R14.1
NetR30_2: R30.2 U6.4 | length 1.6
  Top Layer w0.3: U6.4 1.5,19.05 R30.2
NetR53_1: R53.1 U11.24 | length 1.9
  Top Layer w0.3: R53.1 12.65,33.1 13,33.1 13.25,32.85 U11.24
NetR54_2: R54.2 U11.39 | length 2.6
  Top Layer w0.3: R54.2 13.7,22 14.25,22.55 U11.39
NetR59_1: R59.1 U11.20 | length 6.8
  Top Layer w0.3: R59.1@12.15,37.5 12.329,37.5 12.95,36.879 12.95,36.464 13.914,35.5 14.297,35.5 15.018,34.779 15.05,34.779 15.05,33.721 15.25,33.521 U11.20
NetR60_1: R60.1 U11.21 | length 5.4
  Top Layer w0.3: R60.1 12.407,36.3 13.707,35 14.09,35 14.5,34.59 14.5,33.564 14.75,33.314 U11.21
NetR61_1: R61.1 U11.7 | length 2.4
  Top Layer w0.3: U11.7 22.05,28.3 R61.1@22.5,28.75
NRESET: C59.1 J10.3 R51.2 S1.2 U10.17 | length 32.1
  Top Layer w0.3: v1(6.35,25.35) 6.301,25.35 5.701,24.75 4.143,24.75 3.6,24.207 3.6,23.493 3.1,22.993 3.1,20.329 2.65,19.879 2.65,16.455 3.205,15.9 4.688,15.9 6.388,14.2 13.26,14.2 J10.3
  Bottom Layer w0.3: v1(6.35,25.35) C59.1 U10.17
PFOUT: C62.1 C63.2 C64.2 C65.1 U11.18 U11.23 U11.37 | length 17.9
  Top Layer w0.3: C63.2 13,35 13.75,34.25 U11.23 ; C65.1 13.1,23.4 13.25,23.55 U11.37 13.25,24.65 v1@13.9,25.3 ; C64.2@15.9,34.05 16.15,34.05 16.25,33.95 U11.18 16.25,30.95 v1(16.2,30.9)
  Bottom Layer w0.3: v1@13.9,25.3 13.9,27 16,29.1 16,29.8 16.2,30 v1(16.2,30.9)
  Bottom Layer w0.7: C62.1 14.95,34.6 C62.1@15.5,34.6
  other v1: 13.9,25.2 13.8,34.3
  other v2: 15.9,34.5
RD_N: J2.1 R58.2 U11.13 | length 11.4
  Top Layer w0.3: U11.13 18.75,36.9 R58.2 19.35,37.5 19.35,43.45 J2.1
RD_P: J2.2 R57.1 U11.14 | length 8.5
  Top Layer w0.3: J2.2 18.45,40.64 R57.1 ; U11.14 R57.1@18.25,38.5
RX: U5.6 U10.74 | length 6.1
  Bottom Layer w0.3: U10.74 25.195,18.9 25.6,19.305 25.6,20.891 26.4,21.691 26.4,23.2 26.6,23.4 v1@26.6,23.5
  other v1: 26.6,23.6
RX_ERF: J5.5 U10.49 | length 11.4
  Bottom Layer w0.3: U10.49 21.9,34.186 27.42,39.706 J5.5 ; J5.5@27.12,40.606 J5.5@27.12,41
RX_RS485: U2.1 U5.11 | length 13.1
  Top Layer w0.3: v1(28,15.8) 28,15.775 28.675,15.1 29.255,15.1 29.9,15.745 29.9,22 31.45,23.55 U5.11
  Bottom Layer w0.3: U2.1 27.3,16.2 27.7,15.8 v1(28,15.8)
SCK: U10.78
SCL: J4.7 U10.24 | length 15.4
  Bottom Layer w0.3: J4.7@3.68,41 4.668,41 9.9,35.768 9.9,30.405 9.395,29.9 U10.24
SDA: J4.8 U10.25 | length 17.7
  Bottom Layer w0.3: J4.8@2.41,43.54 2.5,43.45 2.5,40.766 3.266,40 4.961,40 9.4,35.561 9.4,30.707 9.093,30.4 U10.25
SERVO1: U5.3 U10.68 | length 6.8
  Top Layer w0.3: v1(25.8,27.4) U5.3@26,27.4
  Bottom Layer w0.3: U10.68 25.195,21.9 25.4,22.105 25.4,27 v1(25.8,27.4)
SERVO1_EXT: J5.3 U5.14 | length 16.1
  Top Layer w0.3: J5.3 32.7,38.26 32.7,32.094 30.775,30.169 30.775,28.361 31.776,27.36 U5.14
SERVO2: U5.4 U10.69 | length 6.1
  Bottom Layer w0.3: U10.69 25.402,21.4 25.9,21.898 25.9,25.9 v1(26.1,26.1)
SERVO2_EXT: J5.4 U5.13 | length 20.5
  Top Layer w0.3: J5.4 28.69,40.856 32.2,37.346 32.2,32.301 30.275,30.376 30.275,28.154 30.787,27.641 30.775,27.629 30.775,27.091 31.776,26.09 U5.13
SWDCLK: J10.7 U10.5 | length 12.7
  Bottom Layer w0.3: U10.5 9.395,20.4 10.1,19.695 10.1,17.693 9.9,17.493 9.9,12.48 J10.7
SWDIO: J10.8 U10.3 | length 13.7
  Bottom Layer w0.3: U10.3 9.395,19.4 9.6,19.195 9.6,17.9 9.4,17.7 9.4,12.273 11.11,10.563 J10.8
SWO: U10.1
TD_N: J2.3 R56.2 U11.16 | length 11
  Top Layer w0.3: J2.3 16.86,38.89 R56.2 ; U11.16 R56.2@17.25,38.5
TD_P: J2.4 R55.1 U11.17 | length 9.1
  Top Layer w0.3: J2.4 16.2,40.35 16.2,37.45 R55.1 16.75,36.9 U11.17
TGT_P1.0: U10.95 U11.3 | length 19
  Top Layer w0.3: v1(16.6,28.1) 18.11,28.1 18.7,27.51 18.7,26.798 19.198,26.3 U11.3
  Bottom Layer w0.3: U10.95 12.9,17.972 12.3,18.572 12.3,21.614 14.6,23.914 14.6,26.914 15.786,28.1 v1(16.6,28.1)
TGT_P1.1: U10.94 U11.4 | length 18.5
  Top Layer w0.3: v1(18.9,28.3) 19.2,28 19.2,27.005 19.405,26.8 U11.4
  Bottom Layer w0.3: U10.94 13.4,18.179 12.8,18.779 12.8,21.407 15.1,23.707 15.1,26.707 15.793,27.4 16.9,27.4 17.8,28.3 v1(18.9,28.3)
TGT_P1.4: U10.93 U11.2 | length 17.1
  Top Layer w0.3: v1(17.9,27.3) 18.2,27 18.2,26.586 18.986,25.8 U11.2
  Bottom Layer w0.3: U10.93 13.9,18.386 13.3,18.986 13.3,21.2 15.6,23.5 15.6,26.5 16,26.9 17.107,26.9 17.507,27.3 v1(17.9,27.3)
TGT_P1.8: U10.92 U11.40 | length 8.1
  Top Layer w0.3: U11.40 14.75,22.16 15,21.91 14.9,21.81 v1(14.9,21.7)
  Bottom Layer w0.3: U10.92 14.4,18.593 13.8,19.193 13.8,20.507 14.9,21.607 v1(14.9,21.7)
TGT_P1.9: U10.91 U11.43 | length 8.5
  Top Layer w0.3: v1(15,20.7) 16.25,21.95 U11.43
  Bottom Layer w0.3: U10.91 14.9,18.8 14.3,19.4 14.3,20.3 14.7,20.7 v1(15,20.7)
TGT_P1.10: U10.90 U11.44 | length 8.3
  Top Layer w0.3: v1(15,19.8) 15.1,19.9 15.3,19.9 15.8,20.4 15.8,20.793 16.75,21.743 U11.44
  Bottom Layer w0.3: v1(15,19.8) 15.1,19.7 15.2,19.7 15.2,19.503 15.4,19.303 U10.90
TGT_P1.14: U10.89 U11.41 | length 7.5
  Top Layer w0.3: U11.41 15.25,22.65 v1(15.5,22.4)
  Bottom Layer w0.3: v1(15.5,22.4) 15.7,22.2 15.7,20.29 15.7,19.71 15.9,19.51 U10.89
TGT_P1.16: U10.87 U11.31 | length 15.7
  Top Layer w0.3: U11.31 13.082,27.8 15.203,27.8 16.4,26.603 v1(16.4,26.2)
  Bottom Layer w0.3: v1(16.4,26.2) 16.4,20.99 17.1,20.29 17.1,19.71 16.9,19.51 U10.87
TGT_P1.17: U10.86 U11.30 | length 17
  Top Layer w0.3: U11.30 13.289,28.3 15.111,28.3 15.41,28.3 17.41,26.3 v1(17.5,26.3)
  Bottom Layer w0.3: U10.86 17.4,19.303 17.6,19.503 17.6,20.497 16.9,21.197 16.9,25.7 v1(17.5,26.3)
TGT_RX: J10.6 U10.99 | length 10.6
  Bottom Layer w0.3: U10.99 10.9,12.187 12.087,11 12.794,11 13.65,10.144 J10.6
TGT_SCON: U10.64
TGT_TX: J10.5 U10.98 | length 8.6
  Bottom Layer w0.3: U10.98 11.4,12.394 12.294,11.5 13.001,11.5 14.501,10 J10.5
TX: U5.5 U10.75 | length 8.6
  Bottom Layer w0.3: U10.75 25.402,18.4 26.1,19.098 26.1,20.684 26.9,21.484 26.9,22.81 27.3,23.21 27.3,24.1 v1(26.6,24.8)
TX_ERF: J5.6 U10.48 | length 13.2
  Bottom Layer w0.3: U10.48 21.4,34.393 26.15,39.143 J5.6
TX_RS485: U2.4 U5.12 | length 11.9
  Top Layer w0.3: v1(28.965,15.8) 29.4,16.235 29.4,22.207 30.275,23.082 30.275,23.675 31.42,24.82 U5.12
  Bottom Layer w0.3: U2.4 28.8,15.965 v1(28.965,15.8)
Y: J1.3 R2.1 R4.2 U2.6 | length 7.1
  Top Layer w0.3: R2.1 R4.2 30.21,13.25 J1.3
  Bottom Layer w0.3: U2.6 30.76,12.7 J1.3
Z: J1.4 R2.2 R6.1 U2.7 | length 15.1
  Top Layer w0.3: R6.1 R2.2 29.25,10.15 30.4,9 31.294,9 33.44,11.146 J1.4
  Bottom Layer w0.3: U2.7 28.8,11.918 29.428,11.29 J1.4 J1.4@33.35,11.2
pads on no net: C7.0 C8.0 C9.0 C10.0 C11.0 C12.0 C13.0 C14.0 C15.0 C20.0 C21.0 C51.0 C52.0 C53.0 C54.0 C55.0 C56.0 C57.0 C58.0 C59.0 C60.0 C62.0 C63.0 C64.0 C65.0 C66.0 C67.0 C68.0 C69.0 D4.2 D51.0 FB1.0 J1.drill J2.drill J4.drill J5.drill J8.drill J10.drill LED1.0 R1.0 R2.0 R3.0 R4.0 R5.0 R6.0 R13.0 R14.0 R15.0 R16.0 R17.0 R30.0 R51.0 R52.0 R53.0 R54.0 R55.0 R56.0 R57.0 R58.0 R59.0 R60.0 R61.0 S1.0 U6.1 U10.2 U10.4 U10.8 U10.9 U10.14 U10.16 U10.18 U10.19 U10.20 U10.21 U10.32 U10.33 U10.34 U10.35 U10.36 U10.37 U10.38 U10.46 U10.47 U10.50 U10.51 U10.52 U10.56 U10.57 U10.58 U10.59 U10.60 U10.61 U10.62 U10.63 U10.65 U10.66 U10.67 U10.70 U10.73 U10.79 U10.80 U10.81 U10.82 U10.85 U10.100 U11.1 U11.5 U11.6 U11.8 U11.9 U11.10 U11.11 U11.12 U11.25 U11.33 U11.38 U11.42 U11.45 U11.46 X1.2 X1.4

## Polygon pours and split planes (outlines as drawn)
GND on Bottom Layer "Top Layer-No Net 1" (solid, remove dead copper, pour order 8): 0,6 0,45 24.3,45 24.3,39.5 27,39.5 27,20 26,20 26,6
GND on Top Layer "Top Layer-No Net 1" (solid, remove dead copper, pour order 9): 0,6 26,6 26,20 27.8,20 27.8,39.5 24.3,39.5 24.3,45 0,45

## Keep-outs
Keep-Out Layer:
  the board outline again, w0.1

## Silkscreen, mask and mechanical layers (free items; w line width, h text height)
Top Overlay:
  text "v0.2" at 7.4,15.4 h1.6